# EAGLE board fibre_sensor_board (EAGLE 7.2.0)
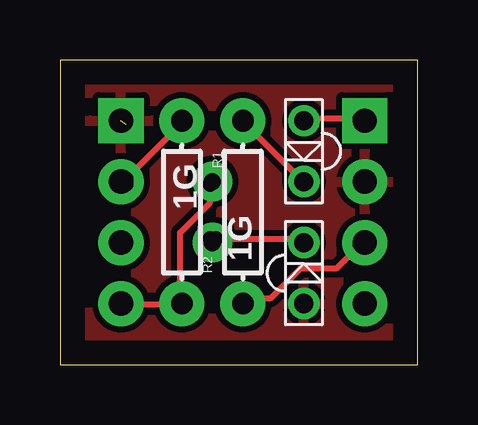
[diagram p0: board, top side]
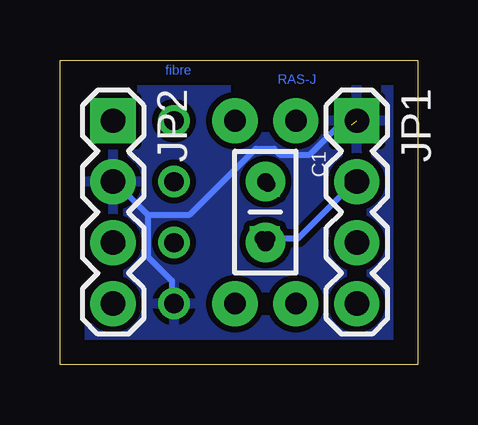
[diagram p1: board, bottom side, seen from below]

Size 14.91 x 12.69 mm. Coordinates in mm from the lower left corner, seen from the top.
Outline: 0,0 14.91,0 14.91,12.69 0,12.69 0,0
Copper layers (1*16): Top 0.035mm / dielectric 1.5mm / Bottom 0.035mm
Design rules "UoM_design_rules": minimum track width 0.25mm, minimum drill 0.3mm, track to track 0.25mm, track to pad 0.25mm, pad to pad 0.25mm, via to via 0.25mm, smd to smd 8mil, copper to edge 40mil, drill to drill 8mil, minimum pad ring 10mil, minimum via ring 8mil, stop-mask expansion 4mil, vias tented up to drill 0mil, thermal gap 10mil

## Footprints (pad centres in the part's own frame; a part is rotated, then mirrored left to right if it is on the bottom)
TH_0.1-CAP = drill 0.7 pad 1.651: 1 0,0; 2 2.54,0
TH_0.1-LED = drill 0.8: A 1.27,0; C -1.27,0
TH_0.1-PD = drill 0.8: A 1.27,0; C -1.27,0
1X04 = drill 1.016 pad 1.88 square: 1 -3.81,0 | drill 1.016 pad 1.88: 2 -1.27,0; 3 1.27,0; 4 3.81,0
TH_0.3-RES = drill 0.9 pad 1.88: P$1 -3.81,0; P$2 3.81,0

## Placement (x,y rotation side)
C1  [TH_0.1-CAP]  6.35,7.62 270 bottom
D1  LED  [TH_0.1-LED]  10.16,8.89 90 top
D2  PD  [TH_0.1-PD]  10.16,3.81 270 top
JP1  [1X04]  2.54,6.35 270 bottom
JP2  [1X04]  12.7,6.35 270 bottom
R1  1G  [TH_0.3-RES]  5.08,6.35 270 top
R2  1G  [TH_0.3-RES]  7.62,6.35 90 top

## Library data of the parts
C1 D1 D2 JP1 JP2 R1 R2 = passive_components

## Nets
LED-: JP2.3 R2.P$1
N$1: D1.C R2.P$2
OA-: C1.2 D2.C JP1.2 R1.P$1
OAO: C1.1 JP1.4 R1.P$2
VCC: D1.A JP2.1
VSS: D2.A JP1.1 JP2.2

## Tracks (layer width: path | path; a pad name or v marks a point on that pad's centre or on a via)
LED-  (via drill 0.6)
  Top 0.25: v12.5,5 11.5,4 10,4 8.75,2.75 7.75,2.75 R2.P$1
  Bottom 0.25: v12.5,5 JP2.3
N$1
  Top 0.25: D1.C 10,7.75 7.75,10 R2.P$2
OA-  (via drill 0.6)
  Top 0.25: v6.5,5.25 10,5.25 D2.C | v2.75,7.75 5,10 R1.P$1 | v6.25,5.25 C1.2 | v2.75,7.5 JP1.2
  Bottom 0.25: v6.5,5.25 C1.2 | v2.75,7.75 JP1.2 | v6.25,5.25 5,5.25 v2.75,7.5
OAO  (via drill 0.6)
  Top 0.25: v6.25,7.5 6.25,6.75 5,5.5 5,2.75 R1.P$2 5,2.5 v2.75,2.5
  Bottom 0.25: v6.25,7.5 C1.1 | v2.75,2.5 JP1.4
VCC  (via drill 0.6)
  Top 0.25: v12.5,10.25 10.25,10.25 D1.A
  Bottom 0.25: v12.5,10.25 JP2.1
VSS  (1 unrouted)
  Bottom 0.25: 11.25,6.25 11.25,4.5 10.25,3.5 10.25,2.75 D2.A | 12.5,7.5 11.25,6.25 | 2.75,10 3.25,10 4.5,8.75 5.75,8.75 6,9 6.75,9 9.5,6.25 11.25,6.25
  pour Top: -2.54,12.7 15.24,13.97 15.24,0 -2.54,-1.27
  pour Bottom: -1.27,13.97 15.24,13.97 15.24,0 -1.27,0

## Text on the board
Bottom: RAS-J | fibre